# Altium PCB RFFE_AC.PcbDoc
Units mm, origin at the board's own origin, x right, y up, seen from the top; angles counter-clockwise.
Board outline 50 x 105 mm, 4 copper layers (Top Layer, MidLayer1, Mid-Layer 2, Bottom Layer), stack 1.478 mm thick; 91 components, 67 nets, 401 pads, 833 vias.
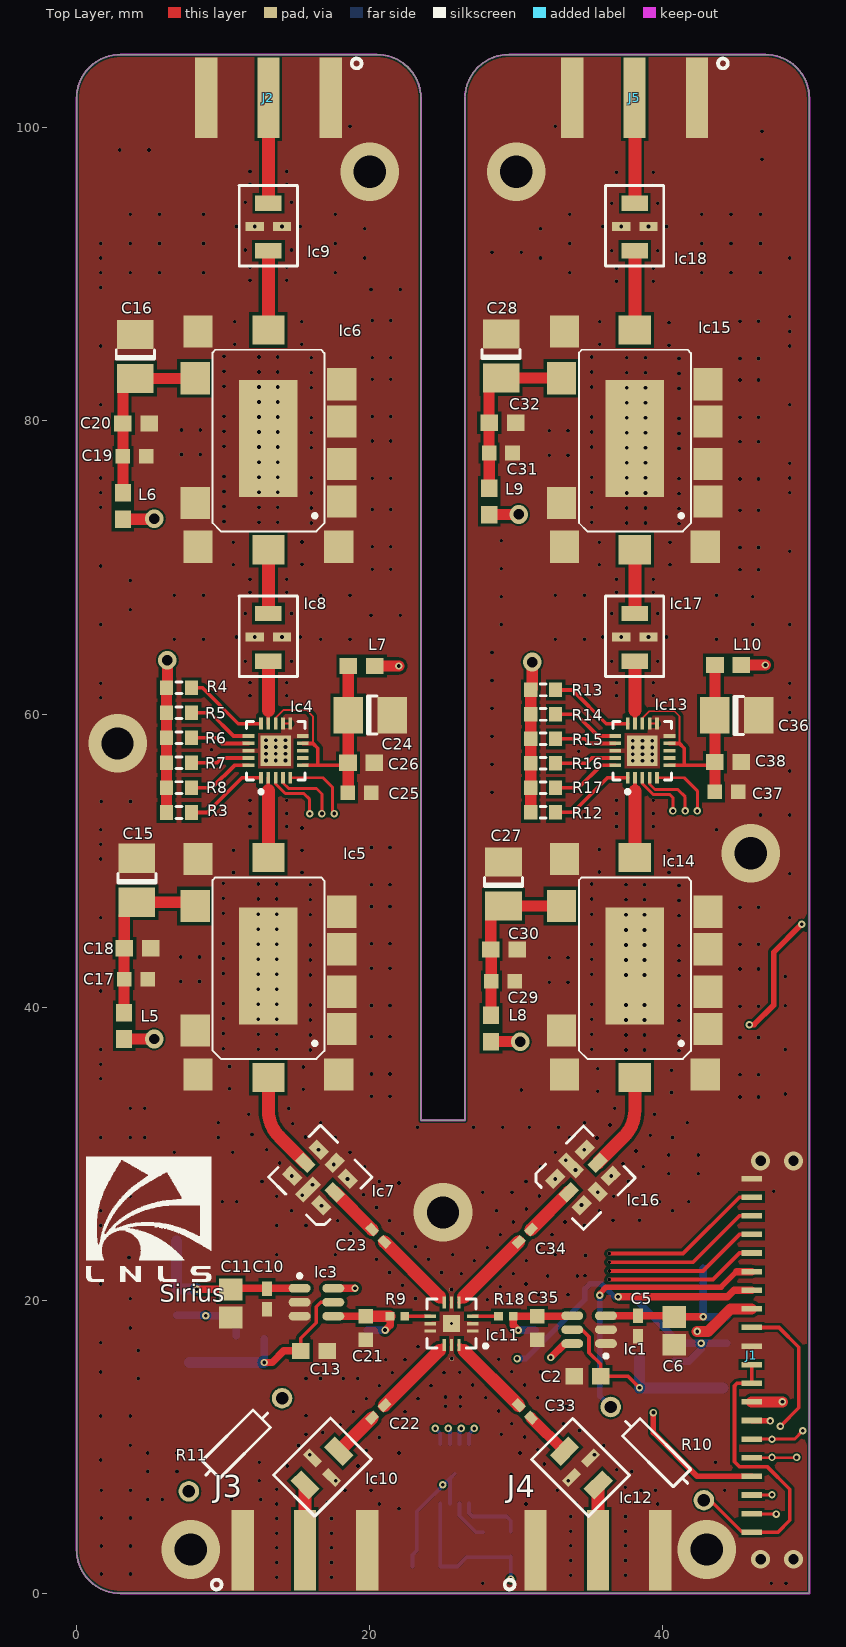
[diagram p0: Top Layer view]
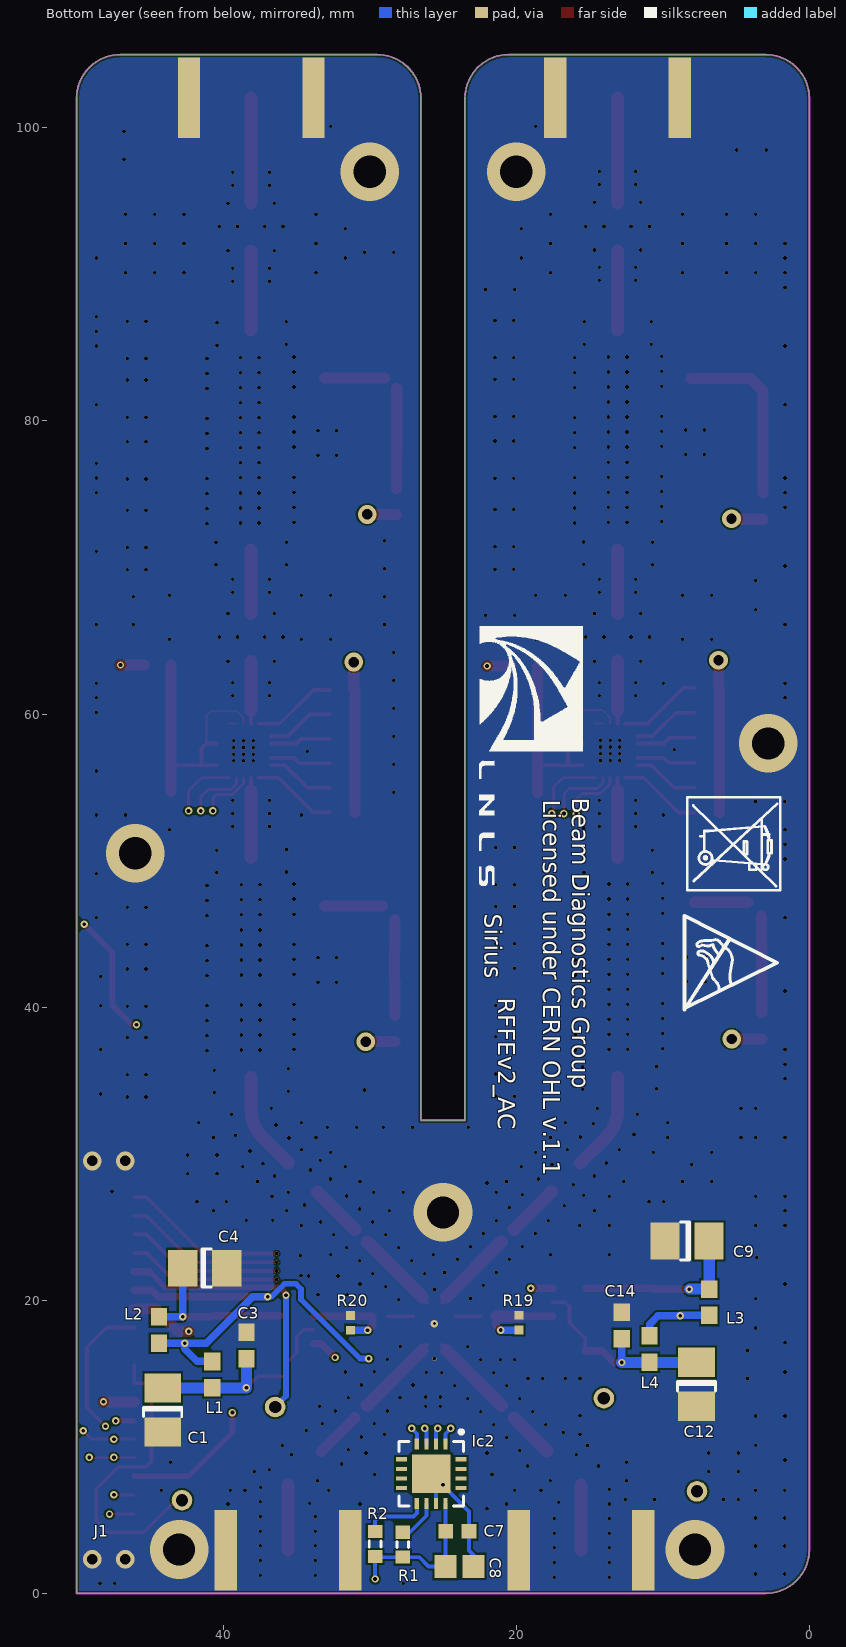
[diagram p1: Bottom Layer view, seen from below]
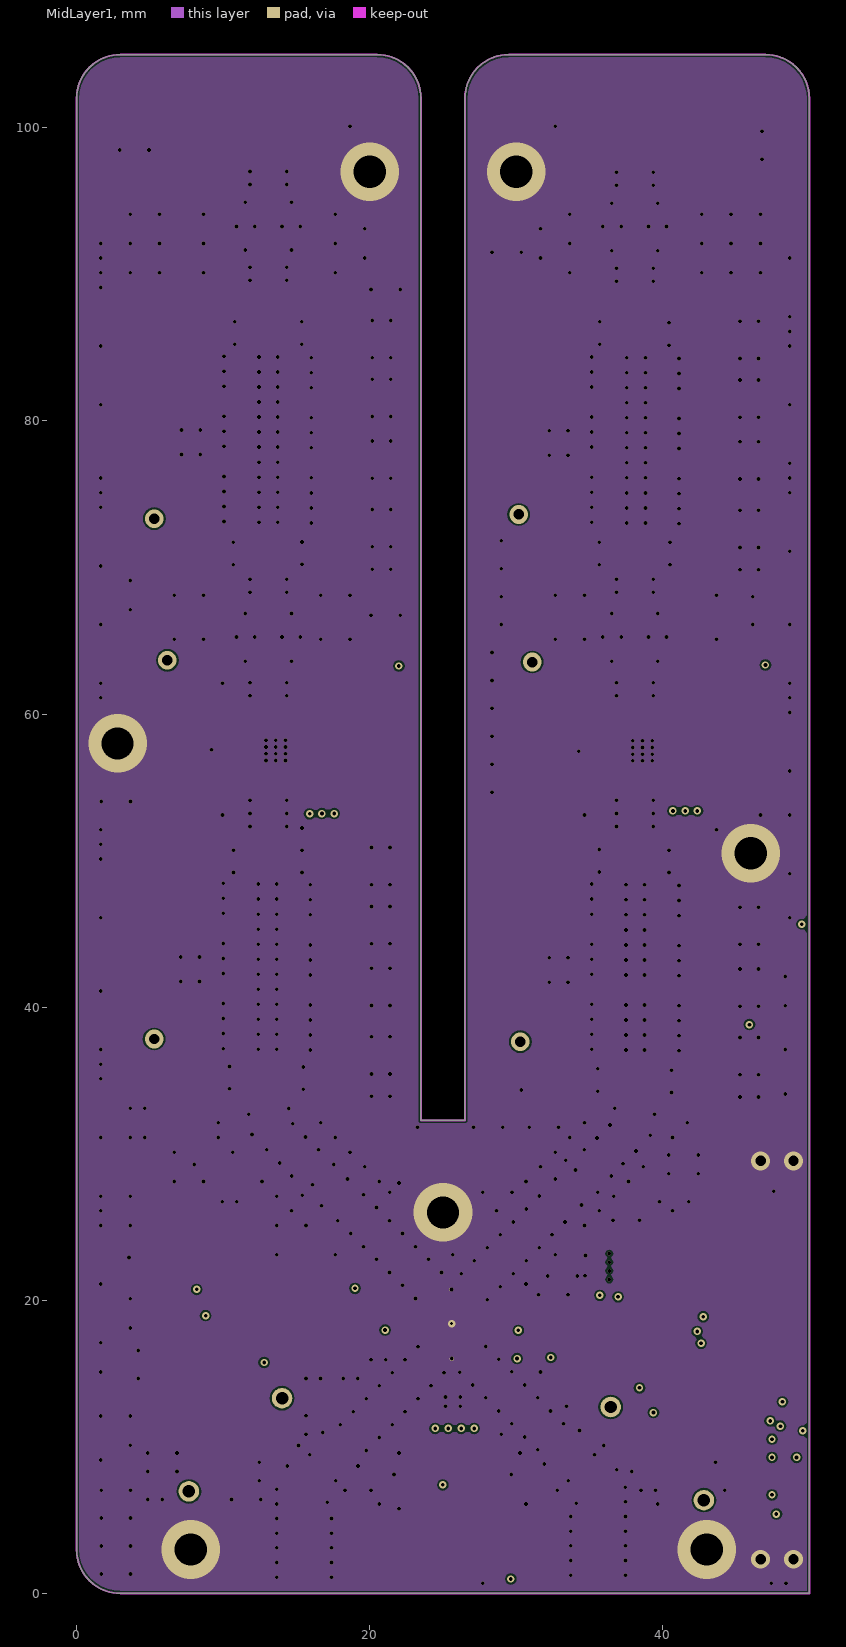
[diagram p2: MidLayer1]
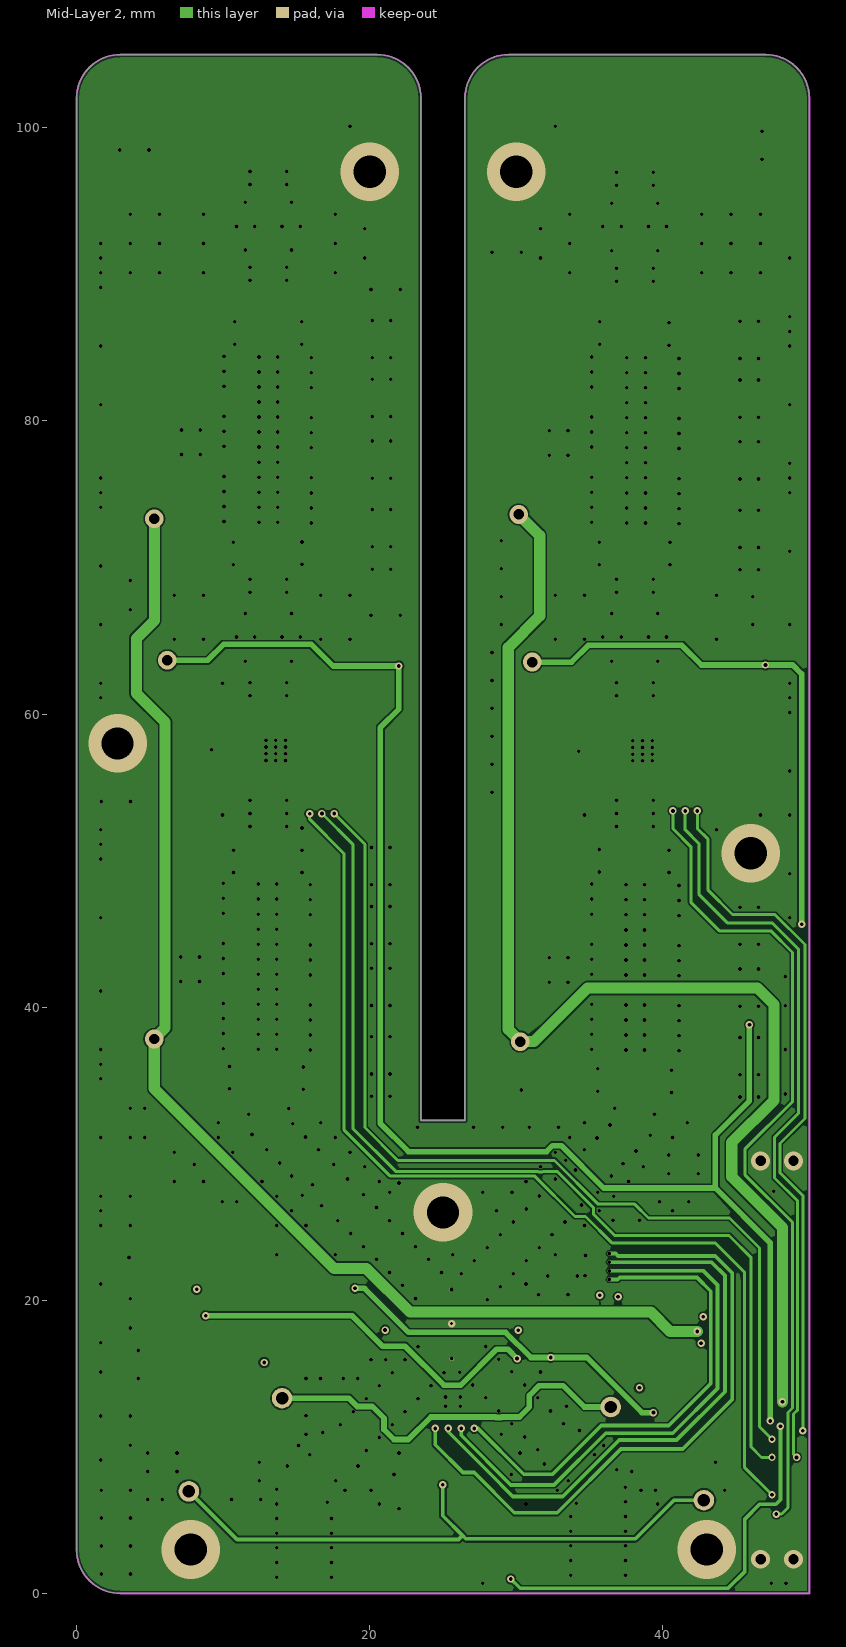
[diagram p3: Mid-Layer 2]

## Layer stack, top to bottom
Top Layer: signal copper 0.0356
Dielectric: core 0.508, RO4350, Dk 3.48
MidLayer1: signal copper 0.0356
Dielectric: prepreg 0.32, FR-4, Dk 4.8
Mid-Layer 2: signal copper 0.0356
Dielectric: core 0.508, RO4350, Dk 3.48
Bottom Layer: signal copper 0.0356

## Board outline
0,3 ccw(c3,3) 3,0 50,0 50,102 ccw(c47,102) 47,105 29.5,105 ccw(c29.5,102) 26.5,102 26.5,32.275 23.5,32.275 23.5,102 ccw(c20.5,102) 20.5,105 3,105 ccw(c3,102) 0,102

## Design rules (kind name [scope] priority, off if disabled: settings)
Clearance Clearance_1 [InPolygon vs OnTopLayer] p1: gap=0.203
Clearance [All] p2: gap=0.127
HoleToHoleClearance [All] p1: gap=0.127 allowstackedmicrovias=TRUE
MinimumSolderMaskSliver [All] p1 off: minsoldermaskwidth=0.254
PlaneConnect [All] p1: planeconnectstyle=Direct reliefexpansion=0.508 reliefentries=4 reliefconductorwidth=0.254 reliefairgap=0.254
PolygonConnect [All] p1: connectstyle=Direct reliefconductorwidth=0.254 reliefentries=4 polygonreliefangle="90 Angle" airgapwidth=0.254
RoomDefinition RFFE_v2 [InComponentClass('RFFE_v2')] p1: confinementstyle=ConfineIn formatcopy=TRUE lockcomponents=FALSE outline -158.34,-147.89 -107.54,-147.89 -107.54,-122.49 -158.34,-122.49
RoutingVias [All] p1: holewidth=0.711 width=1.27 viastyle="Through Hole" minholewidth=0.711 minwidth=1.27 maxholewidth=0.711 maxwidth=1.27
SilkToSilkClearance [All] p1 off: silktosilkclearance=0.254
SilkToSolderMaskClearance [IsPad] p1 off: minsilkscreentomaskgap=0.254 clearancetoexposedcopper=TRUE
SolderMaskExpansion [All] p1: expansion=0.102
Width [All] p1: maxlimit=0.889 minlimit=0.127 preferedwidth=0.254
23 further rules are at their usual default settings.

## Components (designator, comment, footprint, x,y, rotation, side; value= is the part's Value field where it differs from the comment)
C1 "CAP TANT 4.7UF" CAPC3528M 44.12,12.52 r270 bottom
C2 "C1608C0G1H101J" CAPC1608M 34.86,14.82 r0 top
C3 "C1608C0G1H102J" CAPC1608M 38.41,16.92 r90 bottom
C4 "CAP TANT 4.7UF" CAPC3528M 41.26,22.2 r180 bottom
C5 "UMK105CG101JV-F" CAPC1005M 38.31,18.26 r270 top
C6 "CAP CER 10000PF" CAPC2012M 40.78,17.92 r270 top
C7 "C1608C0G1H101J" CAPC1608N 24.02,4.24 r0 bottom
C8 "CAP CER 10000PF" CAPC2012M 23.87,1.84 r180 bottom
C9 "CAP TANT 4.7UF" CAPC3528M 8.35,24.05 r0 bottom
C10 "UMK105CG101JV-F" CAPC1005M 13,20.1 r270 top
C11 "CAP CER 10000PF" CAPC2012M 10.52,19.78 r270 top
C12 "CAP TANT 4.7UF" CAPC3528M 7.7,14.27 r270 bottom
C13 "C1608C0G1H101J" CAPC1608M 16.2,16.55 r180 top
C14 "C1608C0G1H102J" CAPC1608M 12.8,18.29 r90 bottom
C15 "CAP TANT 4.7UF" CAPC3528M 4.12,48.66 r90 top
C16 "CAP TANT 4.7UF" CAPC3528M 4.01,84.4 r90 top
C17 "C1608C0G1H101J" CAPC1608N 4.05,41.9 r180 top
C18 "C1608C0G1H102J" CAPC1608M 4.16,44.02 r0 top
C19 "C1608C0G1H101J" CAPC1608N 3.96,77.58 r180 top
C20 "C1608C0G1H102J" CAPC1608M 4.06,79.82 r0 top
C21 "C1608C0G1H101J" CAPC1608N 19.74,18.11 r90 top
C22 "UMK105CG101JV-F" CAPC1005N 20.59,12.41 r45 top
C23 "UMK105CG101JV-F" CAPC1005N 20.59,24.41 r315 top
C24 "CAP TANT 4.7UF" CAPC3528M 20.04,59.93 r0 top
C25 "C1608C0G1H101J" CAPC1608N 19.3,54.63 r180 top
C26 "C1608C0G1H102J" CAPC1608M 19.42,56.68 r0 top
C27 "CAP TANT 4.7UF" CAPC3528M 29.13,48.41 r90 top
C28 "CAP TANT 4.7UF" CAPC3528M 28.97,84.43 r90 top
C29 "C1608C0G1H101J" CAPC1608N 29.1,41.78 r180 top
C30 "C1608C0G1H102J" CAPC1608M 29.16,43.93 r0 top
C31 "C1608C0G1H101J" CAPC1608N 28.95,77.81 r180 top
C32 "C1608C0G1H102J" CAPC1608M 29.06,79.88 r0 top
C33 "UMK105CG101JV-F" CAPC1005N 30.59,12.41 r135 top
C34 "UMK105CG101JV-F" CAPC1005N 30.59,24.41 r45 top
C35 "C1608C0G1H101J" CAPC1608N 31.44,18.11 r90 top
C36 "CAP TANT 4.7UF" CAPC3528M 45.05,59.91 r0 top
C37 "C1608C0G1H101J" CAPC1608N 44.34,54.69 r180 top
C38 "C1608C0G1H102J" CAPC1608M 44.45,56.72 r0 top
Ic1 "TS5A3160DBVR" TSOP95P280X145-6N 34.97,18 r180 top
Ic2 "ADT7320UCPZ-R2" QFN127P600-8N 25.8,8.17 r270 bottom
Ic3 "TS5A3160DBVR" TSOP95P280X145-6N 16.37,19.87 r0 top
Ic4 "DAT-31R5-SP+" DG983-1 13.59,57.5 r90 top
Ic5 "TAMP-72LN+" JQ1382 18.09,35.41 r90 top
Ic6 "TAMP-72LN+" JQ1382 18.09,71.41 r90 top
Ic7 "TA1113A" TST-TA1114A 15.11,28.41 r135 top
Ic8 "LFCN-530+" FV1206 13.09,63.61 r90 top
Ic9 "LFCN-530+" FV1206 13.09,91.61 r90 top
Ic10 "LFCN-530+" FV1206 15.59,7.41 r45 top
Ic11 "RFSW6223" QFN50P300X300X85_HS-13N1 25.59,18.41 r180 top
Ic12 "LFCN-530+" FV1206 35.59,7.41 r135 top
Ic13 "DAT-31R5-SP+" DG983-1 38.6,57.5 r90 top
Ic14 "TAMP-72LN+" JQ1382 43.09,35.41 r90 top
Ic15 "TAMP-72LN+" JQ1382 43.09,71.41 r90 top
Ic16 "TA1113A" TST-TA1114A 34.592,29.888 r45 top
Ic17 "LFCN-530+" FV1206 38.09,63.61 r90 top
Ic18 "LFCN-530+" FV1206 38.09,91.61 r90 top
J1 "SFM-120-02-S-SH" SFM-120-02-S-SH 47.03,15.92 r90 bottom locked
J2 "132289" SMAedge50R 17.34,102.05 r180 top
J3 "132289" SMAedge50R 11.33,2.95 r0 top
J4 "132289" SMAedge50R 31.32,2.95 r0 top
J5 "132289" SMAedge50R 42.33,102.05 r180 top
L1 "BLM18HE601SN1D" CAPC1608M 40.74,14.93 r270 bottom
L2 "BLM18HE601SN1D" CAPC1608M 44.38,17.97 r270 bottom
L3 "BLM18HE601SN1D" CAPC1608M 6.83,19.87 r270 bottom
L4 "BLM18HE601SN1D" CAPC1608M 10.9,16.67 r270 bottom
L5 "BLM18HE601SN1D" CAPC1608M 3.25,38.73 r270 top
L6 "BLM18HE601SN1D" CAPC1608M 3.16,74.19 r270 top
L7 "BLM18HE601SN1D" CAPC1608M 19.45,63.28 r0 top
L8 "BLM18HE601SN1D" CAPC1608M 28.28,38.55 r270 top
L9 "BLM18HE601SN1D" CAPC1608M 28.16,74.51 r270 top
L10 "BLM18HE601SN1D" CAPC1608M 44.46,63.35 r0 top
R1 "PNM0603E1002BST5" RESC1608N 27.74,3.33 r90 bottom
R2 "PNM0603E1002BST5" RESC1608N 29.63,3.37 r90 bottom
R3 "ERJ-3GEYJ103V" RESC1608N 6.99,53.28 r180 top
R4 "ERJ-3GEYJ103V" RESC1608N 6.99,61.79 r180 top
R5 "ERJ-3GEYJ103V" RESC1608N 6.99,60.088 r180 top
R6 "ERJ-3GEYJ103V" RESC1608N 6.99,58.386 r180 top
R7 "ERJ-3GEYJ103V" RESC1608N 6.99,56.684 r180 top
R8 "ERJ-3GEYJ103V" RESC1608N 6.99,54.982 r180 top
R9 "ERJ-2GEJ102X" RESC1005L 21.89,18.91 r180 top
R10 "CMF5546R400FHEB" AXIAL9.0 37.66,11.51 r135 top
R11 "CMF5546R400FHEB" AXIAL9.0 12.81,12.11 r45 top
R12 "ERJ-3GEYJ103V" RESC1608N 31.84,53.3 r180 top
R13 "ERJ-3GEYJ103V" RESC1608N 31.84,61.65 r180 top
R14 "ERJ-3GEYJ103V" RESC1608N 31.84,59.98 r180 top
R15 "ERJ-3GEYJ103V" RESC1608N 31.84,58.31 r180 top
R16 "ERJ-3GEYJ103V" RESC1608N 31.84,56.64 r180 top
R17 "ERJ-3GEYJ103V" RESC1608N 31.84,54.97 r180 top
R18 "ERJ-2GEJ102X" RESC1005L 29.29,18.91 r0 top
R19 "ERJ-2GEJ102X" RESC1005L 19.82,18.48 r90 bottom
R20 "ERJ-2GEJ102X" RESC1005L 31.3,18.46 r90 bottom

## Footprints (in the part's own frame and the unit in brackets; to place one, negate y for a bottom-side part, rotate by r counter-clockwise, add the part's x,y. Pads: shape width x height; smd on the part's side, far side on the other; paste and mask are expansions set on the pad)
AXIAL9.0 [mm] "RES 46.4 OHM 1% 50PPM 1/2W"
  round 1.4 hole 0.85: 1(-7.275,0) 2(1.715,0)
  silkscreen extent -5.68,-0.85 0.3,0.83, body extent -7.47,-1.14 2.11,1.16, height 4.14
CAPC1005M [mm] "Chip Capacitor, Body 1.0x0.5mm, IPC Low Density"
  rect 1x0.7 smd: 1(-0.7,0) 2(0.7,0)
  body extent -0.55,-0.3 0.55,0.3, height 0.6
CAPC1005N [mm] "Chip Capacitor, Body 1.0x0.5mm, IPC Medium Density"
  rect 0.8x0.6 smd: 1(-0.6,0) 2(0.6,0)
  body extent -0.55,-0.3 0.55,0.3, height 0.6
CAPC1608M [mm] "Chip Capacitor, Body 1.6x0.8mm, IPC Low Density"
  rect 1.2x1.1 smd: 1(-0.9,0) 2(0.9,0)
  body extent -0.87,-0.48 0.87,0.48, height 0.85
CAPC1608N [mm] "Chip Capacitor, Body 1.6x0.8mm, IPC Medium Density"
  rect 1x1 smd: 1(-0.8,0) 2(0.8,0)
  body extent -0.87,-0.48 0.87,0.48, height 0.85
CAPC2012M [mm] "Chip Capacitor, Body 2.0x1.3mm, IPC Low Density"
  rect 1.5x1.6 smd: 1(-0.95,0) 2(0.95,0)
  body extent -1.1,-0.72 1.1,0.72, height 1.1
CAPC3528M [mm] "Chip Capacitor, Body 3.5x2.8mm, IPC Low Density"
  rect 2x2.5 smd: 1(-1.5,0) 2(1.5,0)
  silkscreen extent -0.23,-1.3 0.45,1.3, body extent -2.1,-1.45 2.1,1.45, height 1.66
DG983-1 [mm]
  rect 0.81x0.25 smd: 1(-1.845,1) 2(-1.845,0.5) 3(-1.845,0) 4(-1.845,-0.5) 5(-1.845,-1) 11(1.845,-1) 12(1.845,-0.5) 13(1.845,0) 14(1.845,0.5) 15(1.845,1)
  rect 0.25x0.81 smd: 6(-1,-1.845) 7(-0.5,-1.845) 8(0,-1.845) 9(0.5,-1.845) 10(1,-1.845) 16(1,1.845) 17(0.5,1.845) 18(0,1.845) 19(-0.5,1.845) 20(-1,1.845)
  rect 2.06x2.06 smd: 21(0,0)
  silkscreen extent -2.92,-2 2,2, body extent -2,-2 2,2, height 0.9
FV1206 [mm]
  rect 1.04x1.8 smd: 1(0,0) 3(3.25,0)
  rect 0.61x1.245 smd: 2(1.65,-0.927) 4(1.65,0.927)
  silkscreen extent -1.05,-1.97 4.45,1.99, body extent 0.05,-1.2 3.4,1.16, height 1
JQ1382 [mm]
  rect 2.2x2 smd: 1(3.1,0) 2(5.65,0) 3(8.55,0) 4(11.1,0) 6(14.7,9.8) 7(11.5,10) 8(3,10) 9(0,9.8) 11(0,0.2)
  rect 2x2.2 smd: 5(14.8,5) 10(-0.2,5)
  rect 8x4 smd: 12(7.4,5)
  rect 0x0 smd: 13(3.73,3.434) 14(5.88,3.434) 15(6.23,5.934) 16(6.23,3.784) 17(8.73,3.434) 18(6.58,3.434) 19(6.23,0.934) 20(6.23,3.084)
  silkscreen extent 1.06,1.17 13.44,8.81, body extent 0.22,0.57 14.14,10.46, height 3
QFN50P300X300X85_HS-13N1 [mm] "QFN, 12-Leads, Body 3,00x3,00mm, Pitch 0,50mm, Thermal Pad 1,15x1,15mm, IPC Medium Density"
  rect 0.8x0.22 smd: 1(-1.45,0.5) 2(-1.45,0) 3(-1.45,-0.5) 7(1.45,-0.5) 8(1.45,0) 9(1.45,0.5)
  rect 0.22x0.8 smd: 4(-0.5,-1.45) 5(0,-1.45) 6(0.5,-1.45) 10(0.5,1.45) 11(0,1.45) 12(-0.5,1.45)
  rect 1.15x1.15 smd: 13(0,0)
  silkscreen extent -2.45,-1.68 1.68,1.68, body extent -1.53,-1.53 1.53,1.53, height 0.85
QFN127P600-8N [mm] "16-Lead Lead Frame Chip Scale Package [LFCSP_WQ]   4 mm × 4 mm Body, Very Very Thin Quad"
  rect 0.75x0.3 smd: 1(-2.025,0.975) 2(-2.025,0.325) 3(-2.025,-0.325) 4(-2.025,-0.975) 9(2.025,-0.975) 10(2.025,-0.325) 11(2.025,0.325) 12(2.025,0.975)
  rect 0.3x0.75 smd: 5(-0.975,-2.025) 6(-0.325,-2.025) 7(0.325,-2.025) 8(0.975,-2.025) 13(0.975,2.025) 14(0.325,2.025) 15(-0.325,2.025) 16(-0.975,2.025)
  rect 2.6x2.6 smd: 17(0,0)
  silkscreen extent -2.97,-2.2 2.2,2.2, body extent -2.05,-2.05 2.05,2.05, height 0.85
RESC1005L [mm] "Chip Resistor, Body 1.1x0.5mm, IPC High Density"
  rect 0.6x0.6 smd: 1(-0.5,0) 2(0.5,0)
  body extent -0.55,-0.3 0.55,0.3, height 0.4
RESC1608N [mm] "Chip Resistor, Body 1.6x0.8mm, IPC Medium Density"
  rect 0.9x1 smd: 1(-0.85,0) 2(0.85,0)
  silkscreen extent -0.2,-0.4 0.2,0.4, body extent -0.85,-0.48 0.85,0.48, height 0.6
SFM-120-02-S-SH [mm]
  rect 0.38x1.4 smd far side: 1(-11.74,-0.97) 2(-10.47,-0.97) 3(-9.2,-0.97) 4(-7.93,-0.97) 5(-6.66,-0.97) 6(-5.39,-0.97) 7(-4.12,-0.97) 8(-2.85,-0.97) 9(-1.58,-0.97) 10(-0.31,-0.97) 11(0.96,-0.97) 12(2.23,-0.97) 13(3.5,-0.97) 14(4.77,-0.97) 15(6.04,-0.97) 16(7.31,-0.97) 17(8.58,-0.97) 18(9.85,-0.97) 19(11.12,-0.97) 20(12.39,-0.97) 20(12.39,-0.97)
  body extent -14.29,-1.78 14.29,8, height 4
SMAedge50R [mm] "SMA connector for RF board edge"
  rect 1.524x5.5 smd: 1(0,0) 2(8.5,0)
  rect 1.524x5.5 smd far side: 3(0,0) 4(8.5,0)
  rect 1.5x5.5 smd: 5(4.25,0)
  silkscreen extent -2.11,-2.68 -1.44,-2, body extent -0.75,-17.1 9.25,2, height 3.96
TSOP95P280X145-6N [mm] "TSOP, 6-Leads, Body 2,90x1,60mm, Pitch 0,95mm, IPC Medium Density"
  oval 1.5x0.6 smd: 1(-1.15,0.95) 2(-1.15,0) 3(-1.15,-0.95) 4(1.15,-0.95) 5(1.15,0) 6(1.15,0.95)
  silkscreen extent -1.28,1.68 -1.03,1.92, body extent -0.9,-1.55 0.9,1.55, height 1.45
TST-TA1114A [mm] "SMD3.8x3.8"
  rect 1.19x0.81 smd: 1(-2.49,0.225) 2(-2.49,-1.045) 3(-2.49,-2.315) 5(0.33,-2.315) 6(0.33,-1.045) 7(0.33,0.225)
  rect 0.81x1.19 smd: 4(-1.08,-2.445)
  rect 0.81x1.7 smd: 8(-1.08,0.121)
  silkscreen extent -3.58,-3.58 1.42,1.42, body extent -3.01,-2.91 0.8,0.84, height 1.3

## Part data
C1 C4 C9 C12 C15 C16 C24 C27 C28 C36: library part T495B475K016ZTE800, "CAP TANT 4.7UF 16V 10% 1411"
C2 C7 C13 C17 C19 C21 C25 C29 C31 C35 C37: "CAP CER 100PF 50V 5% NP0 0603"
C3 C14 C18 C20 C26 C30 C32 C38: "CAP CER 1000PF 50V 5% NP0 0603"
C5 C10 C22 C23 C33 C34: "CAP CER 100PF 50V 5% NP0 0402"
C6 C8 C11: library part C2012C0G1H103J/0.60, "CAP CER 10000PF 50V 5% NP0 0805"
Ic1 Ic3: "IC SWITCH SPDT SOT23-6"
Ic2: "IC SENSR TEMP 16BIT DGTL 16LFCSP"
Ic4 Ic13: library part Minicircuits-DAT-31R5-SP+, "Serial Digital Step Attenuator 31.5 step:0.5dB"
Ic5 Ic6 Ic14 Ic15: library part Minicircuits-TAMP-72LN+, "LNA 20 dB Low Noise Figure"
Ic7 Ic16: library part TST_TA1113A, "TST_TA1113A"
Ic8 Ic9 Ic10 Ic12 Ic17 Ic18: library part Minicircuits-LFCN-530+, "Low Pass Filter 3dB@530MHz"
Ic11: library part RFMD_RFSW6223, "CrossbarSwitch"
J2 J3 J4 J5: "CONN SMA JACK 50 OHM EDGE MNT"
L1 L2 L3 L4 L5 L6 L7 L8 L9 L10: "FERRITE CHIP 600 OHM 800MA 0603"
R1 R2: "RES 10K OHM .15W 0.1% 0603 SMD"
R3 R4 R5 R6 R7 R8 R12 R13 R14 R15 R16 R17: "RES 10K OHM 1/10W 5% 0603 SMD"
R9 R18 R19 R20: "RES 1K OHM 1/10W 5% 0402 SMD"
R10 R11: "RES 46.4 OHM 1% 50PPM 1/2W"

## Free pads (board coordinates)
  rect 1.5x5.5 smd: 0(8.84,102.05) 0(8.84,102.05) 0(11.33,2.95) 0(11.33,2.95) 0(13.09,102.05) 0(15.58,2.95) 0(17.34,102.05) 0(17.34,102.05) 0(19.83,2.95) 0(19.83,2.95) 0(31.32,2.95) 0(31.32,2.95) 0(33.83,102.05) 0(33.83,102.05) 0(35.57,2.95) 0(38.08,102.05) 0(39.82,2.95) 0(39.82,2.95) 0(42.33,102.05) 0(42.33,102.05)

## Via types
v1: diameter 0.254, hole 0.254, Top Layer to Bottom Layer, 773 vias
v2: diameter 0.508, hole 0.254, Top Layer to Bottom Layer, 40 vias
v3: diameter 1.27, hole 0.711, Top Layer to Bottom Layer, 10 vias
v4: diameter 4, hole 2.2, Top Layer to Bottom Layer, 7 vias
v5: diameter 0.305, hole 0.254, Top Layer to Bottom Layer, 2 vias
v6: diameter 0.5, hole 0.2, Top Layer to Bottom Layer, 1 vias

## Nets (pads, with @x,y where several pads share a name; then routed paths per layer and width w, separated by ;. In a path a pad name is that pad's centre, name@x,y a point inside that pad or via, vN(x,y) a via of type N, cw(c..) or ccw(c..) an arc to the next point about the centre after c; other vN are vias at no path point)
+3V: J1.7 L7.2 L10.2 R3.2 R4.2 R5.2 R6.2 R7.2 R8.2 R12.2 R13.2 R14.2 R15.2 R16.2 R17.2 | length 173.4
  Top Layer w0.381: v2(45.91,38.81) 46.235,38.81 47.56,40.135 47.56,43.745 v2(49.476,45.661) ; J1.7@46.089,11.771 v2(47.324,11.771)
  Top Layer w0.762: R3.2 R8.2 R7.2 R6.2 R5.2 R4.2 ; R4.2@6.2,61.85 v3(6.2,63.67) ; L7.2 v2(21.99,63.28) ; R12.2 R17.2 R16.2 R15.2 R14.2 R13.2 31.09,61.75 v3(31.09,63.55) ; L10.2 v2(47,63.35)
  Mid-Layer 2 w0.381: v3(6.2,63.67) 8.948,63.67 10.038,64.76 16.025,64.76 17.505,63.28 v2(21.99,63.28) 21.99,60.343 20.723,59.076 20.723,32.067 22.641,30.149 32.07,30.149 32.476,30.555 33.071,30.555 35.96,27.666 43.589,27.666 ; v3(31.09,63.55) 33.781,63.55 34.927,64.696 41.289,64.696 42.635,63.35 v2(47,63.35) 48.87,63.35 49.476,62.744 v2@49.476,45.81 ; v2(45.91,38.81) 45.91,33.61 43.589,31.29 43.589,27.666 ; v2(47.324,11.771) 47.324,23.931 43.589,27.666
+5V: J1.14 L1.1 L2.2 L3.2 L4.1 | length 60
  Top Layer w0.508: v2(36.951,20.243) 44.414,20.243 44.861,20.69 J1.14
  Mid-Layer 2 w0.381: v2(8.81,18.95) 18.807,18.95 20.887,16.87 22.408,16.87 25.061,14.217 26.223,14.217 28.666,16.66 29.428,16.66 v2(30.059,16.029)
  Bottom Layer w0.381: v2(30.059,16.029) 30.663,16.029 34.682,20.048 34.682,20.78 35.022,21.12 35.824,21.12 36.701,20.243 v2(36.951,20.243)
  Bottom Layer w0.508: L3.2 v2@8.79,18.97 ; v2(8.81,18.95) 10.33,18.95 10.9,18.38 L4.1 ; v2(36.951,20.243) 37.966,20.243 41.139,17.07 v2(42.61,17.07) ; L1.1 41.76,15.83 42.61,16.68 v2(42.61,17.07) ; L2.2 v2(42.61,17.07)
+5VD: C7.2 C8.1 Ic2.12 J1.12 R1.1 R2.1 | length 48.8
  Top Layer w0.254: J1.12 47.933,18.15 49.283,16.8 49.283,12.672 v2(48.025,11.414)
  Mid-Layer 2 w0.254: v2(29.63,0.989) 30.269,0.35 44.45,0.35 45.6,1.5 45.6,5.085 46.605,6.09 47.715,6.09 48.025,6.4 v2(48.025,11.414)
  Bottom Layer w0.254: Ic2.12 24.825,1.845 25.985,1.845 26.62,2.48 R1.1 R2.1@29.59,2.48 ; v2(29.63,0.989) R2.1
A+5V: J1.13 L5.2 L6.2 | length 92.9
  Top Layer w0.762: L6.2 v3@5.27,73.29 ; L5.2 v3(5.3,37.83) ; v2(42.348,17.88) 43.075,17.88 44.615,19.42 J1.13
  Mid-Layer 2 w0.762: v3(5.31,73.33) 5.31,66.394 4.081,65.165 4.081,61.408 6.044,59.445 6.044,38.574 v3(5.3,37.83) 5.3,34.446 17.568,22.178 19.766,22.178 22.747,19.197 39.188,19.197 40.505,17.88 v2(42.348,17.88)
C+5V: J1.8 L8.2 L9.2 | length 92.9
  Top Layer w0.762: L9.2 v3@30.16,73.61 ; L8.2 v3(30.28,37.65) ; J1.8 v2@48.15,13.07
  Mid-Layer 2 w0.762: v3(30.17,73.62) 31.603,72.187 31.603,66.695 29.458,64.55 29.458,38.472 v3(30.28,37.65) 31.208,37.65 34.867,41.309 46.464,41.309 47.585,40.188 47.585,33.643 44.7,30.758 44.7,28.435 48.16,24.975 v2(48.16,13.08)
NetC1_1: C1.1 C2.2 C3.1 Ic1.5 L1.2 | length 15
  Top Layer w0.254: Ic1.5 34.49,18 34.97,17.52 34.97,16.43 35.76,15.64 C2.2 37.62,14.82 v2(38.41,14.03)
  Bottom Layer w0.762: C3.1 v2(38.41,14.03) C1.1@44.11,14.03
NetC4_1: C4.1 C5.1 C6.1 Ic1.3 L2.1 | length 11.5
  Top Layer w0.508: Ic1.3 C5.1@38.3,18.95 ; C5.1 C6.1@40.69,18.96 ; C6.1@40.79,18.88 v2(42.76,18.88)
  Bottom Layer w0.508: v2(42.76,18.88) C4.1 ; v2@42.77,18.87 L2.1
NetC9_1: C9.1 C10.1 C11.1 Ic3.1 L3.1 | length 11.5
  Top Layer w0.508: v2(8.2,20.75) C11.1@10.5,20.75 ; C11.1@10.61,20.82 Ic3.1
  Bottom Layer w0.762: C9.1@6.83,24.03 L3.1 v2@8.18,20.77
NetC12_1: C12.1 C13.2 C14.1 Ic3.5 L4.2 | length 14.3
  Top Layer w0.254: C13.2 15.3,17.41 16.36,18.47 16.36,19.57 16.66,19.87 Ic3.5
  Top Layer w0.508: v2(12.8,15.76) 13.34,15.76 14.13,16.55 C13.2
  Bottom Layer w0.508: v2@12.8,15.77 C14.1
  Bottom Layer w0.762: C12.1 L4.2 v2@12.8,15.77
NetC15_1: C15.1 C17.2 C18.1 Ic5.7 L5.1 | length 10.2
  Top Layer w0.762: L5.1 C18.1@3.25,44.01 ; C18.1 C15.1@3.26,46.22 ; C15.1@4.2,47.16 Ic5.7@7.84,47.16
NetC16_1: C16.1 C19.2 C20.1 Ic6.7 L6.1 | length 12.2
  Top Layer w0.762: L6.1 3.16,82.05 C16.1 Ic6.7@8.08,82.9
NetC21_2: C21.2 Ic3.4 R9.2 R19.1 | length 6.2
  Top Layer w0.508: Ic3.4 C21.2@19.73,18.92 ; v2(21.05,17.97) 21.39,18.31 R9.2
  Top Layer w0.762: C21.2 R9.2
  Bottom Layer w0.508: R19.1@19.83,17.97 v2(21.05,17.97)
NetC22_1: C22.1 Ic10.3 | length 3.2
  Top Layer w0.889: Ic10.3 C22.1
NetC22_2: C22.2 Ic11.10 | length 5.8
  Top Layer w0.254: 24.755,16.625 cw(c25.09,16.625) Ic11.10
  Top Layer w0.889: C22.2 24.755,16.575
NetC23_1: C23.1 Ic7.2 | length 3.6
  Top Layer w0.889: Ic7.2 C23.1@20.164,24.834
NetC23_2: C23.2 Ic11.6 | length 5.8
  Top Layer w0.254: 24.755,20.195 ccw(c25.09,20.195) Ic11.6
  Top Layer w0.889: C23.2 24.755,20.245
NetC24_1: C24.1 C25.2 C26.1 Ic4.6 Ic4.9 Ic4.13 L7.1 | length 19.3
  Top Layer w0.127: Ic4.13 13.59,59.74 14.13,60.28 15.7,60.28 16.13,59.85 16.13,58
  Top Layer w0.254: Ic4.6 16.46,56.5 ; Ic4.9 16.13,58 16.46,57.67 16.46,56.5 ; C26.1 18.34,56.5 16.46,56.5
  Top Layer w0.762: C25.2@18.54,54.67 C24.1 L7.1@18.54,63.27
NetC27_1: C27.1 C29.2 C30.1 Ic14.7 L8.1 | length 10.4
  Top Layer w0.762: C30.1 C27.1@28.26,45.99 ; L8.1 C29.2@28.28,41.76 ; C29.2 C30.1@28.3,43.89 ; C27.1 Ic14.7
NetC28_1: C28.1 C31.2 C32.1 Ic15.7 L9.1 | length 10.9
  Top Layer w0.762: C31.2 C28.1@28.15,82.21 ; L9.1 C31.2@28.16,77.8 ; C28.1 Ic15.7@33.07,82.93
NetC33_1: C33.1 Ic12.3 | length 3.2
  Top Layer w0.762: C33.1 Ic12.3
NetC33_2: C33.2 Ic11.12 | length 5.8
  Top Layer w0.254: Ic11.12 cw(c26.09,16.625) 26.425,16.625
  Top Layer w0.889: 26.425,16.575 C33.2
NetC34_1: C34.1 Ic11.4 | length 5.8
  Top Layer w0.254: Ic11.4 ccw(c26.09,20.19) 26.42,20.19
  Top Layer w0.889: 26.42,20.24 C34.1
NetC34_2: C34.2 Ic16.2 | length 3.6
  Top Layer w0.889: C34.2 Ic16.2@33.568,27.388
NetC35_2: C35.2 Ic1.4 R18.2 R20.1 | length 6.2
  Top Layer w0.508: v2(30.14,17.95) 29.79,18.3 R18.2 C35.2 Ic1.4@33.78,18.91
  Bottom Layer w0.508: v2(30.14,17.95) R20.1@31.29,17.95
NetC36_1: C36.1 C37.2 C38.1 Ic13.6 Ic13.9 Ic13.13 L10.1 | length 19
  Top Layer w0.127: Ic13.13 38.6,59.72 39.07,60.19 40.8,60.19 41.14,59.85 41.14,58
  Top Layer w0.254: Ic13.6 41.47,56.5 ; Ic13.9 41.14,58 41.47,57.67 41.47,56.5 ; C38.1@43.35,56.5 41.47,56.5
  Top Layer w0.762: C37.2@43.56,54.71 L10.1
NetIc1_6: Ic1.6 Ic3.6 J1.4 | length 36.5
  Top Layer w0.381: v2(39.361,12.34) 39.361,10.979 42.35,7.99 J1.4
  Top Layer w0.508: Ic3.6 v2(19,20.82) ; v2(32.36,16.1) 33.31,17.05 Ic1.6
  Mid-Layer 2 w0.381: v2(19,20.82) 19.647,20.82 22.651,17.816 29.281,17.816 30.997,16.1 v2(32.36,16.1) 34.816,16.1 38.576,12.34 v2(39.361,12.34)
NetIc2_1: Ic2.1 J1.19 | length 56.6
  Top Layer w0.254: v1(36.347,23.189) 41.382,23.189 45.233,27.04 J1.19
  Mid-Layer 2 w0.254: v2(24.47,11.26) 24.47,10.152 26.374,8.248 27.13,8.248 29.872,5.506 32.802,5.506 37.146,9.85 41.363,9.85 44.743,13.23 44.743,21.872 43.583,23.032 36.94,23.032 36.783,23.189 v1(36.347,23.189)
  Bottom Layer w0.254: v2(24.47,11.26) 24.825,10.905 Ic2.1
NetIc2_2: Ic2.2 J1.18 | length 52.2
  Top Layer w0.254: v1(36.347,22.599) 42.062,22.599 45.233,25.77 J1.18
  Mid-Layer 2 w0.254: v2(25.357,11.26) 25.357,11.027 28.084,8.3 29.767,6.617 33.18,6.617 37.027,10.464 40.942,10.464 44.237,13.759 44.237,21.694 43.332,22.599 v1(36.347,22.599)
  Bottom Layer w0.254: v2(25.357,11.26) 25.475,11.142 Ic2.2
NetIc2_3: Ic2.3 J1.17 | length 48.8
  Top Layer w0.254: v1(36.347,22.009) 42.742,22.009 45.233,24.5 J1.17
  Mid-Layer 2 w0.254: v2(26.243,11.26) 26.243,10.789 29.628,7.404 32.584,7.404 36.109,10.929 40.68,10.929 43.731,13.98 43.731,21.055 42.775,22.011 36.349,22.011 v1(36.347,22.009)
  Bottom Layer w0.254: Ic2.3 26.125,11.142 v2(26.243,11.26)
NetIc2_4: Ic2.4 J1.16 | length 45.3
  Top Layer w0.254: v1(36.347,21.419) 43.422,21.419 45.233,23.23 J1.16
  Mid-Layer 2 w0.254: v2(27.13,11.26) 27.389,11.26 30.513,8.136 32.476,8.136 35.795,11.455 40.406,11.455 43.268,14.317 43.268,20.623 42.335,21.556 37.056,21.556 36.919,21.419 v1(36.347,21.419)
  Bottom Layer w0.254: Ic2.4 26.775,10.905 v2(27.13,11.26)
NetIc2_9: Ic2.9 R2.2 | length 4.5
  Bottom Layer w0.254: Ic2.9 26.775,5.485 27.01,5.25 29.34,5.25 29.63,4.96 R2.2
NetIc2_10: Ic2.10 R1.2 | length 2.9
  Bottom Layer w0.254: Ic2.10 26.125,5.305 27.25,4.18 R1.2
NetIc4_1: Ic4.1 R3.1 | length 5.7
  Top Layer w0.254: R3.1 8.92,53.28 11.295,55.655 Ic4.1
NetIc4_2: Ic4.2 Ic5.5 | length 5.4
  Top Layer w0.254: 13.09,54.77 Ic4.2
  Top Layer w0.889: Ic5.5 13.09,54.77
NetIc4_3: Ic4.3 J1.3 | length 75.4
  Top Layer w0.203: Ic4.3 13.59,55.234 14.244,54.58 15.51,54.58 15.907,54.183 v2(15.907,53.196) ; J1.3@46.069,6.729 v2(47.45,6.729)
  Mid-Layer 2 w0.203: v2(15.907,53.196) 15.907,52.816 18.239,50.484 18.239,31.646 21.412,28.473 31.271,28.473 34.017,25.727 34.734,25.727 36.558,23.903 43.589,23.903 45.561,21.931 45.561,8.618 v2(47.45,6.729)
NetIc4_4: Ic4.4 Ic13.4 J1.5 | length 130.7
  Top Layer w0.203: Ic4.4 14.09,55.301 14.477,54.914 16.371,54.914 16.745,54.54 v2(16.745,53.214) ; Ic13.4 39.1,55.226 39.472,54.854 41.021,54.854 41.524,54.351 v2(41.524,53.394) ; J1.5 v2@49.125,9.26
  Mid-Layer 2 w0.203: v2(16.745,53.214) 18.849,51.11 18.849,31.728 21.774,28.803 31.464,28.803 31.513,28.754 31.807,28.754 31.856,28.803 32.78,28.803 35.264,26.319 35.264,25.872 36.719,24.417 44.525,24.417 46.029,22.913 46.029,9.991 46.738,9.282 v2(47.45,9.282) ; v2(41.524,53.394) 41.524,52.102 42.457,51.169 42.457,47.709 44.405,45.761 47.445,45.761 49.275,43.931 49.275,32.775 47.625,31.125 47.625,28.35 49.2,26.775 49.2,12.525 48.925,12.25 48.925,9.482 v2(49.125,9.282)
NetIc4_5: Ic4.5 Ic13.5 J1.6 | length 127.6
  Top Layer w0.203: Ic4.5 16.815,55.655 17.449,55.021 17.449,53.348 v2(17.583,53.214) ; Ic13.5 41.467,55.655 42.356,54.766 v2(42.356,53.394) ; J1.6 48.98,10.53 v2(49.55,11.1)
  Mid-Layer 2 w0.203: v2(17.583,53.214) 19.687,51.11 19.687,31.786 21.925,29.548 32.606,29.548 35.596,26.558 38.079,26.558 39.022,25.615 44.551,25.615 46.593,23.573 46.593,11.382 v2(47.45,10.525) ; v2(42.356,53.394) 42.356,52.199 43.1,51.455 43.1,47.986 44.759,46.327 47.646,46.327 49.7,44.273 49.7,32.4 48,30.7 48,28.7 49.55,27.15 v2(49.55,11.1)
NetIc4_14: Ic4.14 Ic8.1 | length 4.3
  Top Layer w0.254: Ic4.14 13.09,60.23
  Top Layer w0.889: 13.09,60.23 Ic8.1
NetIc4_15: Ic4.15 R4.1 | length 5.8
  Top Layer w0.254: R4.1 8.59,61.79 11.035,59.345 Ic4.15
NetIc4_16: Ic4.16 R5.1 | length 4.6
  Top Layer w0.254: R5.1 9.122,60.088 10.71,58.5 Ic4.16
NetIc4_17: Ic4.17 R6.1 | length 4.1
  Top Layer w0.254: R6.1 9.534,58.386 9.92,58 Ic4.17
NetIc4_19: Ic4.19 R7.1 | length 4
  Top Layer w0.254: R7.1 9.584,56.684 9.9,57 Ic4.19
NetIc4_20: Ic4.20 R8.1 | length 4.5
  Top Layer w0.254: R8.1 9.252,54.982 10.77,56.5 Ic4.20
NetIc5_10: Ic5.10 Ic7.6 | length 6.8
  Top Layer w0.889: Ic5.10 13.09,32.96 ccw(c15.63,32.96) 13.834,31.164 Ic7.6
NetIc6_5: Ic6.5 Ic9.1 | length 5.4
  Top Layer w0.889: Ic6.5 Ic9.1
NetIc6_10: Ic6.10 Ic8.3 | length 4.3
  Top Layer w0.889: Ic8.3 Ic6.10
NetIc9_3: Ic9.3 J2.5 pad.0@13.09,102.05 | length 7.2
  Top Layer w0.889: Ic9.3 J2.5
NetIc10_1: Ic10.1 J3.5 pad.0@15.58,2.95 | length 4.5
  Top Layer w0.889: J3.5 Ic10.1@15.58,7.41
NetIc11_3: Ic11.3 R18.1 | length 1.7
  Top Layer w0.254: Ic11.3 R18.1
NetIc11_7: Ic11.7 R9.1 | length 1.7
  Top Layer w0.254: R9.1 Ic11.7
NetIc12_1: Ic12.1 J4.5 pad.0@35.57,2.95 | length 4.5
  Top Layer w0.889: J4.5 Ic12.1@35.57,7.41
NetIc13_1: Ic13.1 R12.1 | length 5.9
  Top Layer w0.254: R12.1 33.87,53.3 36.225,55.655 Ic13.1
NetIc13_2: Ic13.2 Ic14.5 | length 5.4
  Top Layer w0.254: 38.1,54.77 Ic13.2
  Top Layer w0.889: Ic14.5 38.09,54.76
NetIc13_3: Ic13.3 J1.2 | length 62.2
  Top Layer w0.203: Ic13.3 38.6,55.259 39.335,54.524 40.465,54.524 40.692,54.297 v2(40.692,53.394) ; J1.2@46.092,5.418 v2(47.749,5.418)
  Mid-Layer 2 w0.203: v2(40.692,53.394) 40.692,52.17 41.908,50.954 41.908,47.16 43.856,45.212 47.369,45.212 48.85,43.731 48.85,33.55 45.6,30.3 45.6,28.575 48.85,25.325 48.85,12.65 48.55,12.35 48.55,5.854 48.114,5.418 v2(47.749,5.418)
NetIc13_14: Ic13.14 Ic17.1 | length 4.3
  Top Layer w0.254: Ic13.14 38.1,60.23
  Top Layer w0.889: 38.1,60.23 Ic17.1@38.1,63.6
NetIc13_15: Ic13.15 R13.1 | length 5.9
  Top Layer w0.254: R13.1 33.83,61.65 36.135,59.345 Ic13.15
NetIc13_16: Ic13.16 R14.1 | length 4.7
  Top Layer w0.254: R14.1 34.1,59.98 35.58,58.5 Ic13.16
NetIc13_17: Ic13.17 R15.1 | length 4.2
  Top Layer w0.254: R15.1 34.68,58.31 34.99,58 Ic13.17
NetIc13_19: Ic13.19 R16.1 | length 4.2
  Top Layer w0.254: R16.1 34.8,56.64 35.16,57 Ic13.19
NetIc13_20: Ic13.20 R17.1 | length 4.7
  Top Layer w0.254: R17.1 34.25,54.97 35.78,56.5 Ic13.20
NetIc14_10: Ic14.10 Ic16.6 | length 6.8
  Top Layer w0.889: Ic16.6 37.346,31.164 ccw(c35.55,32.96) 38.09,32.96 Ic14.10
NetIc15_5: Ic15.5 Ic18.1 | length 5.4
  Top Layer w0.889: Ic15.5 Ic18.1
NetIc15_10: Ic15.10 Ic17.3 | length 4.3
  Top Layer w0.889: Ic17.3 Ic15.10
NetIc18_3: Ic18.3 J5.5 pad.0@38.08,102.05 | length 7.2
  Top Layer w0.889: Ic18.3 J5.5@38.09,102.05
NetJ1_15: J1.15 R10.2 R11.2 | length 45.7
  Top Layer w0.381: v2(35.707,20.344) 35.707,20.469 36.145,20.907 43.982,20.907 45.035,21.96
  Top Layer w0.508: 45.035,21.96 J1.15
  Mid-Layer 2 w0.381: R11.2 18.588,13.323 19.154,12.757 20.19,12.757 20.979,11.968 20.979,11.18 21.656,10.503 22.632,10.503 24.172,12.043 28.582,12.043 28.621,12.004 28.989,12.004 29.028,12.043 30.221,12.043 30.898,12.72 30.898,13.509 31.574,14.185 33.19,14.185 34.652,12.723 R10.2
  Bottom Layer w0.381: v2(35.707,20.344) 35.707,13.463 R10.2
RFGND: C1.2 C2.1 C3.2 C4.2 C5.2 C6.2 C9.2 C10.2 C11.2 C12.2 C13.1 C14.2 C15.2 C16.2 C17.1 C18.2 C19.1 C20.2 C21.1 C24.2 C25.1 C26.2 C27.2 C28.2 C29.1 C30.2 C31.1 C32.2 C35.1 C36.2 C37.1 C38.2 Ic1.1 Ic1.2 Ic3.2 Ic3.3 Ic4.10 Ic4.11 Ic4.12 Ic4.18 Ic4.21 Ic5.1 Ic5.2 Ic5.3 Ic5.4 Ic5.6 Ic5.8 Ic5.9 Ic5.11 Ic5.12 Ic6.1 Ic6.2 Ic6.3 Ic6.4 Ic6.6 Ic6.8 Ic6.9 Ic6.11 Ic6.12 Ic7.1 Ic7.3 Ic7.4 Ic7.5 Ic7.7 Ic7.8 Ic8.2 Ic8.4 Ic9.2 Ic9.4 Ic10.2 Ic10.4 Ic11.1 Ic11.2 Ic11.5 Ic11.8 Ic11.9 Ic11.11 Ic11.13 Ic12.2 Ic12.4 Ic13.10 Ic13.11 Ic13.12 Ic13.18 Ic13.21 Ic14.1 Ic14.2 Ic14.3 Ic14.4 Ic14.6 Ic14.8 Ic14.9 Ic14.11 Ic14.12 Ic15.1 Ic15.2 Ic15.3 Ic15.4 Ic15.6 Ic15.8 Ic15.9 Ic15.11 Ic15.12 Ic16.1 Ic16.3 Ic16.4 Ic16.5 Ic16.7 Ic16.8 Ic17.2 Ic17.4 Ic18.2 Ic18.4 J1.11 J1.20 J2.1 J2.2 J2.3 J2.4 J3.1 J3.2 J3.3 J3.4 J4.1 J4.2 J4.3 J4.4 J5.1 J5.2 J5.3 J5.4 pad.0@8.84,102.05 pad.0@11.33,2.95 pad.0@17.34,102.05 pad.0@19.83,2.95 pad.0@31.32,2.95 pad.0@33.83,102.05 pad.0@39.82,2.95 pad.0@42.33,102.05 R19.2 R20.2 | length 1
  Top Layer w0.127: Ic4.12 Ic4.11 ; Ic13.12 Ic13.11
  other v1: 27.715,0.7 47.4,0.7 48.4,0.7 13.66,1.11 17.4,1.11 33.72,1.25 37.46,1.25 1.68,1.335 3.68,1.335 13.66,2.11 17.4,2.11 33.72,2.25 37.46,2.25 13.66,3.11 17.4,3.11 1.68,3.24 3.68,3.24 33.72,3.25 37.46,3.25 13.66,4.11 17.4,4.11 33.72,4.25 37.46,4.25 13.66,5.11 17.4,5.11 1.68,5.145 3.68,5.145 33.72,5.25 37.46,5.25 22,5.78 13.66,6.11 20.66,6.11 30.66,6.11 39.66,6.11 34.095,6.161 17.1,6.22 37.46,6.25 4.855,6.415 5.855,6.415 10.57,6.415 12.57,6.415 1.68,7.05 3.68,7.05 18.317,7.05 20.095,7.05 32.795,7.05 38.51,7.05 39.51,7.05 44.225,7.05 13.66,7.11 37.43,7.25 12.475,7.685 17.682,7.685 33.557,7.685 21.66,8.11 29.66,8.11 4.855,8.32 6.855,8.32 37.875,8.32 36.859,8.447 14.38,8.701 19.206,8.701 31.906,8.828 12.475,8.955 43.59,8.955 1.66,9.11 15.904,9.463 35.335,9.463 4.855,9.59 6.855,9.59 22,9.59 30.255,9.59 19.764,9.749 31.463,9.813 3.66,10.11 15.142,10.098 35.97,10.098 20.647,10.635 30.575,10.679 15.65,10.86 28.985,10.86 16.793,10.987 34.319,11.114 17.994,11.519 21.534,11.519 29.693,11.583 33.233,11.583 1.66,12.11 3.66,12.11 15.65,12.13 18.878,12.404 22.417,12.404 28.805,12.449 32.345,12.449 25.175,12.765 26.175,12.765 33.43,12.765 19.764,13.289 23.304,13.289 27.923,13.353 31.463,13.353 25.175,13.4 26.175,13.4 20.647,14.174 24.187,14.174 27.035,14.219 30.575,14.219 4.22,14.67 15.65,14.67 16.65,14.67 18.19,14.67 19.19,14.67 21.534,15.058 25.073,15.058 26.147,15.085 1.66,15.11 31.66,15.11 29.693,15.122 20.095,15.94 21.095,15.94 22.417,15.944 28.805,15.988 4.22,16.575 23.304,16.828 27.917,16.854 1.66,17.11 3.66,18.11 28.019,20.044 3.66,20.11 23.125,20.123 31.525,20.385 33.525,20.385 28.906,20.928 22.244,21.026 1.66,21.11 30.66,21.11 32.16,21.655 34.16,21.655 34.689,21.681 26.25,21.813 29.792,21.812 21.356,21.892 24.895,21.892 27.136,22.698 30.675,22.698 20.474,22.796 24.013,22.796 3.585,22.925 34.732,23.058 13.66,23.11 17.66,23.11 25.66,23.11 32.66,23.11 28.022,23.582 31.562,23.582 19.586,23.662 23.125,23.662 28.906,24.467 32.445,24.467 18.704,24.566 22.244,24.566 1.66,25.11 3.66,25.11 13.66,25.11 15.66,25.11 34.66,25.11 29.792,25.352 33.332,25.352 17.816,25.432 21.356,25.432 36.605,25.465 38.415,25.465 1.66,26.11 14.66,26.11 28.66,26.11 35.66,26.11 40.66,26.11 30.675,26.237 20.474,26.336 16.717,26.456 34.446,26.506 9.935,26.735 10.935,26.735 39.78,26.735 41.78,26.735 1.66,27.11 3.66,27.11 13.66,27.11 31.562,27.121 36.66,27.11 15.396,27.167 19.586,27.202 21.365,27.37 27.715,27.37 29.715,27.37 35.564,27.37 47.575,27.45 16.107,27.878 22,28.005 6.66,28.11 8.66,28.11 12.66,28.11 20.66,28.11 30.66,28.11 37.66,28.11 18.495,28.284 32.668,28.284 14.685,28.488 36.478,28.488 40.415,28.64 42.415,28.64 34.04,28.894 19.66,29.11 31.66,29.11 38.66,29.11 8.03,29.275 17.555,29.275 37.28,29.31 13.86,29.37 33.379,29.554 40.415,29.91 42.415,29.91 6.66,30.11 10.66,30.11 18.66,30.11 32.66,30.11 38.166,30.194 12.978,30.274 16.514,30.266 34.649,30.266 35.51,31.08 1.66,31.11 3.66,31.11 4.66,31.11 9.66,31.11 17.66,31.11 33.66,31.11 40.66,31.11 15.63,31.14 39.15,31.26 11.97,31.32 23.27,31.815 27.08,31.815 29.08,31.815 30.89,31.815 32.89,31.815 36.397,31.964 14.748,32.044 9.66,32.11 16.66,32.11 34.66,32.11 41.66,32.11 11.75,32.69 39.43,32.7 14.48,33.09 3.66,33.11 4.66,33.11 36.72,33.11 45.266,33.872 46.536,33.872 20.12,33.923 21.39,33.923 48.35,34.075 40.6,34.18 35.56,34.27 30.35,34.355 15.47,34.4 10.43,34.43 1.66,35.11 45.266,35.396 46.536,35.396 20.12,35.447 21.39,35.447 40.6,35.704 35.56,35.794 15.47,35.924 10.43,35.954 1.66,36.11 41.101,37.022 15.955,37.073 37.485,37.073 38.755,37.073 1.66,37.11 48.35,37.11 12.399,37.124 13.669,37.124 35.157,37.124 10.011,37.174 45.266,37.936 46.536,37.936 20.12,37.987 21.39,37.987 41.101,38.047 15.955,38.098 37.485,38.098 38.755,38.098 12.399,38.149 13.669,38.149 35.157,38.149 10.011,38.2 41.101,39.072 15.955,39.123 37.485,39.123 38.755,39.123 12.399,39.174 13.669,39.174 35.157,39.174 10.011,39.225 45.266,40.07 46.536,40.07 41.101,40.098 48.35,40.1 20.12,40.121 21.39,40.121 15.955,40.149 37.485,40.149 38.755,40.149 12.399,40.199 13.669,40.199 35.157,40.199 10.011,40.25 1.66,41.11 12.399,41.225 13.669,41.225 32.262,41.696 33.532,41.696 7.116,41.746 8.386,41.746 48.35,42.1 41.101,42.148 15.955,42.199 37.485,42.199 38.755,42.199 12.399,42.25 13.669,42.25 35.157,42.25 10.011,42.301 45.266,42.61 46.536,42.61 20.12,42.661 21.39,42.661 41.101,43.173 15.955,43.224 37.485,43.224 38.755,43.224 12.399,43.275 13.669,43.275 35.157,43.275 10.011,43.326 32.262,43.372 33.532,43.372 7.116,43.423 8.386,43.423 41.101,44.199 15.955,44.249 37.485,44.249 38.755,44.249 45.266,44.286 46.536,44.286 12.399,44.3 13.669,44.3 35.157,44.3 20.12,44.337 21.39,44.337 10.011,44.351 37.485,45.275 38.755,45.275 12.399,45.325 13.669,45.325 1.66,46.11 48.66,46.11 41.101,46.249 15.955,46.3 37.485,46.3 38.755,46.3 12.399,46.351 13.669,46.351 35.157,46.351 10.011,46.402 45.266,46.826 46.536,46.826 20.12,46.877 21.39,46.877 41.101,47.274 15.955,47.325 37.485,47.325 38.755,47.325 12.399,47.376 13.669,47.376 35.157,47.376 10.011,47.427 41.101,48.3 15.955,48.35 20.12,48.35 21.39,48.35 37.485,48.35 38.755,48.35 12.399,48.401 13.669,48.401 35.157,48.401 10.011,48.452 48.66,49.11 10.71,49.19 15.38,49.19 40.43,49.19 35.67,49.23 1.66,50.11 10.71,50.714 15.38,50.714 40.43,50.714 35.67,50.754 20.12,50.89 21.39,50.89 1.66,51.11 1.66,52.11 43.66,52.11 15.391,52.225 11.84,52.335 14.34,52.335 36.84,52.335 39.34,52.335 9.96,53.11 34.66,53.11 46.66,53.11 48.66,53.11 11.84,53.224 14.34,53.224 36.84,53.224 39.34,53.224 1.68,54.04 3.68,54.04 11.84,54.113 14.34,54.113 36.84,54.113 39.34,54.113 28.35,54.675 48.66,56.11 28.35,56.58 37.951,56.809 38.612,56.809 39.272,56.809 12.932,56.834 13.593,56.834 14.253,56.834 37.951,57.266 38.612,57.266 39.272,57.266 12.932,57.291 13.593,57.291 14.253,57.291 34.26,57.46 9.21,57.56 37.951,57.723 38.612,57.723 39.272,57.723 12.932,57.748 13.593,57.748 14.253,57.748 37.951,58.18 38.612,58.18 39.272,58.18 12.932,58.206 13.593,58.206 14.253,58.206 28.35,58.485 48.66,60.11 28.35,60.39 1.66,61.11 48.66,61.11 11.84,61.253 14.34,61.253 36.84,61.247 39.34,61.247 1.66,62.11 9.96,62.11 48.66,62.11 11.84,62.142 14.34,62.142 36.84,62.136 39.34,62.136 28.35,62.295 11.51,63.61 14.66,63.61 36.51,63.61 39.66,63.61 28.35,64.2 6.66,65.11 8.66,65.11 16.66,65.11 18.66,65.11 32.66,65.11 34.66,65.11 43.66,65.11 10.91,65.26 12.163,65.26 14.017,65.26 15.26,65.26 35.91,65.26 37.163,65.26 39.017,65.26 40.26,65.26 1.66,66.11 28.985,66.105 46.13,66.105 48.66,66.11 20.095,66.74 22.095,66.74 11.51,66.86 14.66,66.86 36.51,66.86 39.66,66.86 3.66,67.11 28.985,68.01 46.13,68.01 6.66,68.11 8.66,68.11 16.66,68.11 18.66,68.11 32.66,68.11 34.66,68.11 43.66,68.11 11.84,68.314 14.34,68.314 36.84,68.308 39.34,68.308 3.66,69.11 11.84,69.203 14.34,69.203 36.84,69.197 39.34,69.197 45.266,69.839 46.536,69.839 20.171,69.89 21.441,69.89 28.985,69.915 1.66,70.11 10.7,70.19 35.67,70.19 40.49,70.19 15.39,70.22 48.66,71.11 45.266,71.363 46.536,71.363 20.171,71.414 21.441,71.414 10.7,71.714 35.67,71.714 40.49,71.714 15.39,71.744 28.985,71.82 41.101,72.988 16.006,73.039 37.545,73.039 38.815,73.039 12.45,73.09 13.72,73.09 35.157,73.09 10.062,73.141 45.266,73.903 46.536,73.903 20.171,73.954 21.441,73.954 41.101,74.014 16.006,74.064 37.545,74.064 38.815,74.064 1.66,74.11 12.45,74.115 13.72,74.115 35.157,74.115 10.062,74.166 41.101,75.039 16.006,75.09 37.545,75.09 38.815,75.09 1.66,75.11 48.66,75.11 12.45,75.14 13.72,75.14 35.157,75.14 10.062,75.191 45.266,76.036 46.536,76.036 41.101,76.064 20.171,76.087 21.441,76.087 1.66,76.11 16.006,76.115 37.545,76.115 38.815,76.115 48.66,76.11 12.45,76.166 13.72,76.166 35.157,76.166 10.062,76.217 48.66,77.11 37.545,77.14 38.815,77.14 12.45,77.191 13.72,77.191 32.262,77.662 33.532,77.662 7.166,77.713 8.436,77.713 41.101,78.115 16.006,78.165 37.545,78.165 38.815,78.165 12.45,78.216 13.72,78.216 35.157,78.216 10.062,78.267 45.266,78.576 46.536,78.576 20.171,78.627 21.441,78.627 41.101,79.14 16.006,79.191 37.545,79.191 38.815,79.191 12.45,79.241 13.72,79.241 35.157,79.241 10.062,79.292 32.262,79.338 33.532,79.338 7.166,79.389 8.436,79.389 41.101,80.165 16.006,80.216 37.545,80.216 38.815,80.216 45.266,80.253 46.536,80.253 12.45,80.267 13.72,80.267 35.157,80.267 20.171,80.304 21.441,80.304 10.062,80.317 1.66,81.11 48.66,81.11 37.545,81.241 38.815,81.241 12.45,81.292 13.72,81.292 41.101,82.216 16.006,82.266 37.545,82.266 38.815,82.266 12.45,82.317 13.72,82.317 35.157,82.317 10.062,82.368 45.266,82.793 46.536,82.793 20.171,82.844 21.441,82.844 41.101,83.241 16.006,83.292 37.545,83.292 38.815,83.292 12.45,83.342 13.72,83.342 35.157,83.342 10.062,83.393 41.101,84.266 45.266,84.266 46.536,84.266 16.006,84.317 20.171,84.317 21.441,84.317 37.545,84.317 38.815,84.317 12.45,84.368 13.72,84.368 35.157,84.368 10.062,84.418 1.66,85.11 48.66,85.11 40.42,85.17 10.79,85.24 15.36,85.24 35.7,85.24 48.66,86.11 40.42,86.694 10.79,86.764 15.36,86.764 35.7,86.764 45.266,86.806 46.536,86.806 20.171,86.857 21.441,86.857 48.66,87.11 20.095,88.965 22.095,88.965 1.66,89.11 36.84,89.537 39.34,89.537 11.84,89.599 14.34,89.599 1.66,90.11 3.66,90.11 5.66,90.11 8.66,90.11 17.66,90.11 33.66,90.11 42.66,90.11 44.66,90.11 46.66,90.11 36.84,90.426 39.34,90.426 11.84,90.488 14.34,90.488 1.66,91.11 19.66,91.11 31.66,91.11 48.66,91.11 28.35,91.505 30.35,91.505 36.51,91.61 39.66,91.61 11.51,91.666 14.66,91.666 1.66,92.11 3.66,92.11 5.66,92.11 8.66,92.11 17.66,92.11 33.66,92.11 42.66,92.11 44.66,92.11 46.66,92.11 19.66,93.11 31.66,93.11 10.91,93.26 12.162,93.26 14.017,93.26 15.26,93.26 35.91,93.26 37.162,93.26 39.017,93.26 40.26,93.26 3.66,94.11 5.66,94.11 8.66,94.11 17.66,94.11 33.66,94.11 42.66,94.11 44.66,94.11 46.66,94.11 36.51,94.86 39.66,94.86 11.51,94.916 14.66,94.916 36.84,96.074 39.34,96.074 11.84,96.136 14.34,96.136 36.84,96.963 39.34,96.963 11.84,97.025 14.34,97.025 46.765,97.855 2.95,98.49 4.95,98.49 46.765,99.76 18.66,100.11 32.66,100.11
  other v3: 46.67,2.33 48.92,2.33 46.67,29.51 48.92,29.51
  other v4: 7.8,3 43,3 25,26 46,50.5 2.8,58 20,97 30,97
  other v5: 25.6,16.03 25.577,20.739
  other v6: 25.59,18.41
TGND: C7.1 C8.2 Ic2.11 Ic2.17 J1.1 J1.9 J1.10 R10.1 R11.1 | length 72.5
  Top Layer w0.254: R10.1 43.234,6.366 45.42,4.18 J1.1 47.854,4.18 48.663,4.989 48.663,7.105 47.113,8.655 45.218,8.655 44.89,8.983 44.89,14.162 45.068,14.34 J1.9 J1.10
  Mid-Layer 2 w0.254: R11.1 10.957,3.675 26.065,3.675 26.34,3.95 ; v2(24.99,7.41) 24.99,5.3 26.34,3.95 ; R10.1 40.766,6.366 38.13,3.73 26.56,3.73 26.34,3.95
  Bottom Layer w0.254: C8.2 22.92,2.63 23.22,2.93 C7.1 23.22,5.59 Ic2.17@25.475,7.845 ; Ic2.11 Ic2.17@25.475,7.845 ; Ic2.17 Ic2.17@25.475,7.845
pads on no net: Ic2.5 Ic2.6 Ic2.7 Ic2.8 Ic2.13 Ic2.14 Ic2.15 Ic2.16 Ic4.7 Ic4.8 Ic5.13 Ic5.14 Ic5.15 Ic5.16 Ic5.17 Ic5.18 Ic5.19 Ic5.20 Ic6.13 Ic6.14 Ic6.15 Ic6.16 Ic6.17 Ic6.18 Ic6.19 Ic6.20 Ic13.7 Ic13.8 Ic14.13 Ic14.14 Ic14.15 Ic14.16 Ic14.17 Ic14.18 Ic14.19 Ic14.20 Ic15.13 Ic15.14 Ic15.15 Ic15.16 Ic15.17 Ic15.18 Ic15.19 Ic15.20

## Polygon pours and split planes (outlines as drawn)
RFGND on Top Layer "Top Layer-No Net" (solid, remove dead copper, pour order 4): 0,104.9 23.985,104.9 23.985,34.185 26.61,34.185 26.61,104.9 50.39,104.9 50.39,0 0,0 0,104.9
RFGND on MidLayer1 "Top Layer-No Net" (solid, remove dead copper, pour order 8): 0,105.175 23.985,105.175 23.985,34.275 26.61,34.275 26.61,105.175 50.39,105.175 50.39,0 0,0 0,105.175
RFGND on Mid-Layer 2 "Top Layer-No Net" (solid, remove dead copper, pour order 10): -0.013,105.1 -0.013,-0.028 50.377,-0.028 50.377,105.1 26.597,105.1 26.597,34.232 26.597,34.361 23.972,34.361 23.972,105.1 -0.013,105.1
RFGND on Bottom Layer "Top Layer-No Net" (solid, remove dead copper, pour order 6): -0.003,105.025 -0.003,-0.024 50.387,-0.024 50.387,105.025 26.607,105.025 26.607,34.21 23.982,34.21 23.982,105.025 -0.003,105.025
no net on Bottom Solder "Keep-Out Layer-No Net" (solid): 42.002,51.408 cw(c42.107,51.481) 42.07,51.603 ccw(c41.524,53.394) 42.084,51.607 ccw(c41.524,53.394) 43.397,53.394 ccw(c41.524,53.394) 42.341,55.079 cw(c42.397,55.193) 42.276,55.233 42.374,56.016 cw(c42.5,56) 42.5,56.127 46,56.127 cw(c46,54) 48.127,54 48.127,50.449 cw(c48,50.449) 48.126,50.432 cw(c46,50.5) 46.068,48.374 cw(c46.051,48.5) 46.051,48.373 42.5,48.373 cw(c42.5,48.5) 42.492,48.373 cw(c42.456,48.495) 42.329,48.481
no net on Bottom Solder "Bottom Solder-No Net" (solid): 5.673,0 5.673,3 cw(c7.8,3) 7.8,5.127 9.776,5.127 22.324,17.676 ccw(c20.998,19.002) 22.325,17.676 ccw(c21,19) 22.873,19 ccw(c21,19) 22.325,20.324 ccw(c20.998,18.998) 22.324,20.324 ccw(c22.414,20.414) 22.325,20.324 22.324,20.324 cw(c22.414,20.414) 22.324,20.325 22.324,20.324 9.41,33.238 cw(c9.5,33.328) 9.373,33.328 9.373,54 cw(c9.5,54) 9.373,54.001 ccw(c7.5,54) 7.501,55.873 ccw(c7.5,54.003) 7.5,55.873 2.8,55.873 cw(c2.8,58) 2.8,60.127 cw(c2.8,60) 2.801,60.127 7.5,60.127 ccw(c7.5,62) 9.373,61.999 cw(c9.5,62) 9.373,62 9.373,72.5 cw(c9.5,72.5) 9.373,72.501 9.373,72.5 cw(c9.245,72.5) 9.373,72.5 9.373,78 ccw(c7.5,78) 7.5,79.873 2,79.873 cw(c2,82) -0.127,82 -0.127,102 cw(c3,102) 2.999,105.127 cw(c3,105) 3,105.127 20.5,105.127 cw(c20.5,105) 20.501,105.127 ccw(c20.5,102.003) 20.5,105.127 20.501,105.127 cw(c20.5,102) 23.627,102.001 cw(c23.5,102) 23.627,102 23.627,82 cw(c21.5,82) 21.5,79.873 17,79.873 ccw(c17,78) 15.127,78.001 cw(c15,78) 15.127,78 15.127,39 ccw(c25,39) 25,29.127 ccw(c25,39) 34.873,39 34.873,78 ccw(c33,78) 33,79.873 28.5,79.873 cw(c28.5,82) 26.373,82 26.373,102 cw(c29.5,102) 29.499,105.127 cw(c29.5,102.003) 29.5,105.127 47.146,105.127 cw(c47.146,102.146) 50.127,102.146 cw(c50,102.146) 50.104,102.073 cw(c50,102) 50.127,102 50.127,82 cw(c48,82) 48,79.873 42.5,79.873 ccw(c42.5,78) 40.627,78 40.627,58 cw(c40.5,58) 40.627,57.999 cw(c42.497,58) 40.627,58 40.627,57.999 ccw(c42.5,58) 42.5,56.127 cw(c42.5,56) 42.627,56 cw(c42.5,56) 42.626,55.984 42.526,55.184 cw(c42.4,55.2) 42.513,55.141 cw(c42.397,55.193) 42.341,55.079 ccw(c41.524,53.394) 42.084,51.607 cw(c42.122,51.485) 42.248,51.5 42.572,48.605 cw(c42.5,48.5) 42.627,48.5 cw(c42.5,48.5) 42.5,48.373 ccw(c42.5,46.5) 42.491,48.373 cw(c42.456,48.495) 42.426,48.371 ccw(c42.5,46.5) 40.627,46.501 cw(c40.5,46.5) 40.627,46.5 40.627,32.328 cw(c40.5,32.328) 40.59,32.238 28.676,20.324 ccw(c28.586,20.414) 28.676,20.325 28.676,20.324 cw(c28.586,20.414) 28.675,20.324 cw(c30.002,18.998) 28.676,20.324 28.675,20.324 ccw(c30,19) 28.675,17.676 ccw(c30.002,19.002) 28.676,17.676 41.224,5.127 43,5.127 cw(c43,3) 45.127,3 cw(c45,3) 45.127,2.999 45.127,0 cw(c45,0) 45,-0.127 31.32,-0.127 cw(c31.32,0) 31.193,0 31.193,8.448 26.82,12.82 ccw(c26.91,12.91) 26.821,12.82 26.82,12.82 ccw(c25.5,11.5) 24.18,12.82 cw(c24.09,12.91) 24.179,12.82 24.18,12.82 19.957,8.598 19.957,0 cw(c19.83,0) 19.83,-0.127 5.8,-0.127 cw(c5.8,0)

## Keep-outs
Keep-Out Layer:
  lines w0.127: 0,3 ccw(c3,3) 3,0 50,0 50,102 ccw(c47,102) 47,105 29.5,105 ccw(c29.5,102) 26.5,102 26.5,66.7 26.5,36.8 26.5,32.275 23.5,32.275 23.5,36.8 23.5,66.7 23.5,102 ccw(c20.5,102) 20.5,105 3,105 ccw(c3,102) 0,102 0,3

## Silkscreen, mask and mechanical layers (free items; w line width, h text height)
Top Overlay:
  drawing of 5 lines, arcs and shapes, not listed
  text "Sirius" at 5.679,19.498 h2
Bottom Overlay:
  drawing of 113 lines, arcs and shapes, not listed
  text "Beam Diagnostics Group" at 16.575,54.3 h2 r90
  text "Licensed under CERN OHL v.1.1" at 18.55,54.15 h2 r90
  text "Sirius" at 22.55,46.375 h2 r90
  text "RFFEv2_AC" at 21.65,40.65 h2 r90
Bottom Solder:
  lines w0.254: 42.397,55.193 ccw(c41.524,53.394) 42.122,51.485 42.456,48.495 ; 42.4,55.2 42.5,56 ; 46,48.5 ccw(c46,50.5) 48,50.5 ; 46.051,48.5 42.5,48.5 ccw(c42.5,46.5) 40.5,46.5 40.5,32.328 28.586,20.414 ccw(c30,19) 28.586,17.586 41.172,5 43,5 cw(c43,3) 45,3 45,0 31.32,0 31.32,8.5 26.91,12.91 ccw(c25.5,11.5) 24.09,12.91 19.83,8.65 19.83,0 5.8,0 5.8,3 cw(c7.8,3) 7.8,5 9.814,5 9.828,5 22.414,17.586 ccw(c21,19) 22.414,20.414 9.5,33.328 9.5,54 ccw(c7.5,54) 7.5,56 2.8,56 cw(c2.8,58) 2.8,60 7.5,60 ccw(c7.5,62) 9.5,62 9.5,72.5 9.5,78 ccw(c7.5,78) 7.5,80 2,80 cw(c2,82) 0,82 0,102 cw(c3,102) 3,105 20.5,105 cw(c20.5,102) 23.5,102 23.5,82 cw(c21.5,82) 21.5,80 17,80 ccw(c17,78) 15,78 15,39 ccw(c25,39) 25,29 ccw(c25,39) 35,39 35,78 ccw(c33,78) 33,80 28.5,80 cw(c28.5,82) 26.5,82 26.5,102 cw(c29.5,102) 29.5,105 47.146,105 cw(c47.146,102.146) 50,102.146 ; 48,50.449 48,54 ccw(c46,54) 46,56 42.5,56 ; 50,102 50,82 cw(c48,82) 48,80 42.5,80 ccw(c42.5,78) 40.5,78 40.5,58 ccw(c42.5,58) 42.5,56
Mechanical 4:
  circle w0.254: c25,26 r1.1
  circle w0.254: c46,50.5 r1.1
  circle w0.254: c2.8,58 r1.1
  circle w0.254: c30,97 r1.1
  circle w0.254: c20,97 r1.1
  circle w0.254: c41.524,53.394 r2
  circle w0.254: c43,3 r1.1
  circle w0.254: c7.8,3 r1.1
  lines w0.127: 0,8 ccw(c3,8) 3,5 9,5 ccw(c9,8) 11.121,5.879 22.121,16.879 ccw(c20,19) 22.121,21.121 10.371,32.871 ; 0,53 cw(c3,53) 3,56 6.5,56 cw(c6.5,53) 9.5,53 9.5,35 ccw(c12.5,35) 10.379,32.879 ; 0,63 ccw(c3,63) 3,60 6.5,60 ccw(c6.5,63) 9.5,63 9.5,72.5 9.5,77 ccw(c6.5,77) 6.5,80 3,80 ccw(c3,77) 0,77 ; 0,82 0,99.8 ; 5.4,0 19.83,0 ; 19,0 19,6.6 cw(c22,6.6) 19.879,8.721 23.379,12.221 cw(c25.5,10.1) 27.621,12.221 31.121,8.721 cw(c29,6.6) 32,6.6 32,0 ; 23.5,66.7 23.5,36.8 23.5,32.275 26.5,32.275 26.5,36.8 26.5,66.7 ; 23.5,82 23.5,102 ccw(c20.5,102) 20.5,105 3,105 ccw(c3,102) 0,102 0,3 ccw(c3,3) 3,0 50,0 50,102 ; 23.5,83 cw(c20.5,83) 20.5,80 18,80 ccw(c18,77) 15,77 15,39 ccw(c25,39) 25,29 ccw(c25,39) 35,39 35,77 ccw(c32,77) 32,80 29.5,80 cw(c29.5,83) 26.5,83 ; 26.5,82 26.5,102 cw(c29.5,102) 29.5,105 47,105 cw(c47,102) 50,102 ; 31.32,0 45.4,0 ; 39.621,31.879 ccw(c37.5,34) 40.5,34 40.5,45 cw(c43.5,45) 43.5,48 47,48 cw(c47,45) 50,45 ; 39.629,31.871 28.879,21.121 ccw(c31,19) 28.879,16.879 39.879,5.879 ccw(c42,8) 42,5 43,5 cw(c43,3) 45,3 45,2 ccw(c47,2) 47,0 ; 50,59 cw(c47,59) 47,56 43.5,56 cw(c43.5,59) 40.5,59 40.5,77 cw(c43.5,77) 43.5,80 47,80 cw(c47,77) 50,77 ; 50,82 50,102
  lines w1.5: 13.09,100 13.09,105 ; 15.58,0 15.58,5 ; 35.57,0 35.57,5 ; 38.08,100 38.08,105